# EAGLE board SparkFun_Digital_Temperature_Sensor_Breakout_-_TMP102 (EAGLE 7.5.0)
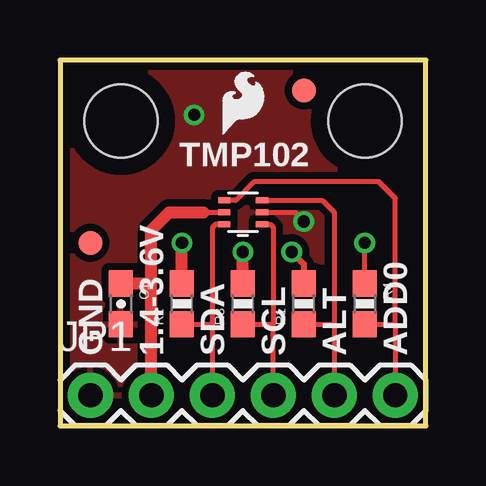
[diagram p0: board, top side]
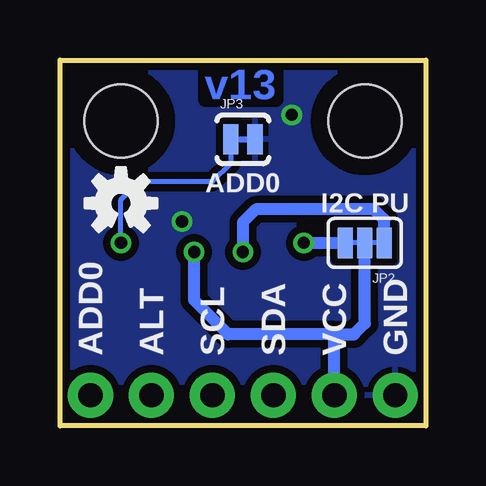
[diagram p1: board, bottom side, seen from below]

Size 15.24 x 15.24 mm. Coordinates in mm from the lower left corner, seen from the top.
Outline: 0,0 15.24,0 15.24,15.24 0,15.24 0,0
Copper layers (1*16): Top 0.035mm / dielectric 1.5mm / Bottom 0.035mm
Design rules "SparkFun-2-layer-TIGHT": minimum track width 7mil, minimum drill 15mil, track to track 7mil, track to pad 7mil, pad to pad 7mil, via to via 7mil, smd to smd 7mil, copper to edge 7mil, drill to drill 7mil, minimum pad ring 7mil, minimum via ring 7mil, stop-mask expansion 4mil, vias tented up to drill 25mil, thermal gap 10mil

## Footprints (pad centres in the part's own frame; a part is rotated, then mirrored left to right if it is on the bottom)
0603-CAP = smd 1.1 x 1: 1 -0.85,0; 2 0.85,0
1X06 = drill 1.016 pad 1.88: 1 0,0; 2 2.54,0; 3 5.08,0; 4 7.62,0; 5 10.16,0; 6 12.7,0
PAD-JUMPER-3-3OF3_NC_BY_TRACE_YES_SILK_FULL_BOX = smd 0.635 x 1.27: 1 -0.813,0; 2 0,0; 3 0.813,0
PAD-JUMPER-2-NC_BY_TRACE_YES_SILK = smd 0.635 x 1.27: 1 -0.508,0; 2 0.508,0
FIDUCIAL-1X2 = smd 1 x 1: 1 0,0
STAND-OFF-TIGHT = hole 3.048: 0,0
0603-RES = smd 1.1 x 1: 1 -0.85,0; 2 0.85,0
SOT563-2 = smd 0.508 x 0.249: 1 -0.8,0.498; 2 -0.8,0.003; 3 -0.8,-0.506; 4 0.776,-0.506; 5 0.776,0.003; 6 0.776,0.498

## Placement (x,y rotation side)
C1  0.1uF  [0603-CAP]  2.54,5.08 270 top
FRAME2  FRAME-LETTER  [CREATIVE_COMMONS]  -22.86,-21.59 0 top  (outside the outline)
JP1  [1X06]  1.27,1.27 0 top
JP2  [PAD-JUMPER-3-3OF3_NC_BY_TRACE_YES_SILK_FULL_BOX]  2.54,7.62 180 bottom
JP3  ADD0  [PAD-JUMPER-2-NC_BY_TRACE_YES_SILK]  7.62,11.94 0 bottom
JP5  FIDUCIAL1X2  [FIDUCIAL-1X2]  1.27,7.62 0 top
JP6  FIDUCIAL1X2  [FIDUCIAL-1X2]  10.16,13.97 0 top
JP7  STAND-OFFTIGHT  [STAND-OFF-TIGHT]  2.54,12.7 0 top
JP8  STAND-OFFTIGHT  [STAND-OFF-TIGHT]  12.7,12.7 0 top
LOGO2  SFE_LOGO_FLAME.1_INCH  [SFE_LOGO_FLAME_.1]  6.48,11.81 0 top
LOGO3  OSHW-LOGOS  [OSHW-LOGO-S]  12.7,9.27 0 bottom
R1  10K  [0603-RES]  10.16,5.08 90 top
R2  4.7K  [0603-RES]  5.08,5.08 90 top
R3  4.7K  [0603-RES]  7.62,5.08 90 top
R4  10K  [0603-RES]  12.7,5.08 270 top
U1  TMP1021:1  [SOT563-2]  7.62,8.89 180 top
U$2  REVISION  [REVISION]  -10.79,-25.4 0 top  (outside the outline)

## Library data of the parts
C1 = SparkFun-Capacitors; PROD_ID: CAP-00810
FRAME2 LOGO2 LOGO3 U$2 = SparkFun-Aesthetics
JP1 JP5-JP8 = SparkFun
JP2 JP3 = SparkFun-Passives
R1 R4 = SparkFun-Resistors; PROD_ID: RES-00824
R2 R3 = SparkFun-Resistors; PROD_ID: RES-07857
U1 = SparkFun-Sensors; PROD_ID: IC-09303

## Nets
ADD0: JP1.6 R4.2 U1.4
ALERT: JP1.5 R1.1 U1.3
GND: C1.2 JP1.1 JP3.2 U1.2
N$1: JP2.1 R3.2
N$2: JP2.3 R2.2
N$3: JP3.1 R4.1
SCL: JP1.4 R3.1 U1.1
SDA: JP1.3 R2.1 U1.6
VCC: C1.1 JP1.2 JP2.2 R1.2 U1.5

## Tracks (layer width: path | path; a pad name or v marks a point on that pad's centre or on a via)
ADD0
  Top 0.203: 13.97,4.23 13.97,9.48 13.29,10.16 8.08,10.16 7.31,9.4 U1.4 | 13.97,4.23 JP1.6 | R4.2 13.97,4.23
ALERT
  Top 0.203: U1.3 10.92,9.4 11.43,8.89 11.43,4.23 | 11.43,4.23 JP1.5 | R1.1 11.43,4.23
GND  (via drill 0.51)
  Top 0.203: U1.2 8.89,8.89 | 8.89,8.89 | 8.89,8.89 9.78,8.89 v10.16,8.51
  other vias: 5.59,12.95
  pour Bottom (isolate 0.305): 0,15.24 15.24,15.24 15.24,0 0,0
  pour Top (isolate 0.305): 0,15.24 15.24,15.24 15.24,0 0,0
N$1  (via drill 0.51)
  Top 0.508: R3.2 v7.62,7.24
  Bottom 0.508: JP2.1 1.73,8.59 2.16,9.02 7.08,9.02 7.62,8.48 v7.62,7.24
N$2  (via drill 0.51)
  Top 0.508: R2.2 v5.08,7.62
  Bottom 0.508: v5.08,7.62 JP2.3
N$3  (via drill 0.51)
  Top 0.203: R4.1 v12.7,7.62
  Bottom 0.203: v12.7,7.62 12.7,9.42 11.96,10.16 8.89,10.16 8.13,10.92 JP3.1
SCL
  Top 0.203: R3.1 8.89,4.23 | U1.1 8.76,8.39 8.89,8.27 8.89,4.23 | JP1.4 8.89,4.23
SDA
  Top 0.203: 6.35,4.23 JP1.3 | R2.1 6.35,4.23 | U1.6 6.49,8.39 6.35,8.26 6.35,4.23
VCC  (via drill 0.51)
  Top 0.203: 5.97,8.89 U1.5
  Top 0.254: v9.65,7.24 10.16,6.73 R1.2
  Top 0.508: JP1.2 3.81,5.93 | 5.97,8.89 4.55,8.89 3.81,8.15 3.81,5.93 | C1.1 3.81,5.93
  Bottom 0.508: 3.81,3.81 3,3.81 2.54,4.27 JP2.2 | JP1.2 3.81,3.81 | 3.81,3.81 8.23,3.81 9.65,5.23 v9.65,7.24

## Text on the board
Bottom: v13
tPlace: TMP102 | GND | 1.4-3.6V | SDA | SCL | ALT | ADD0
bPlace: ADD0 | I2C PU | GND | VCC | SDA | SCL | ALT | ADD0
Measures: Units are in Inches
tDocu: Kade Alexander Jensen | Alex Wende